# Altium PCB mc60_programmer.PcbDoc
Units mm, origin at the board's own origin, x right, y up, seen from the top; angles counter-clockwise.
Board outline 93.09 x 91.31 mm, 2 copper layers (Top Layer, Bottom Layer); 44 components, 39 nets, 246 pads, 56 vias.
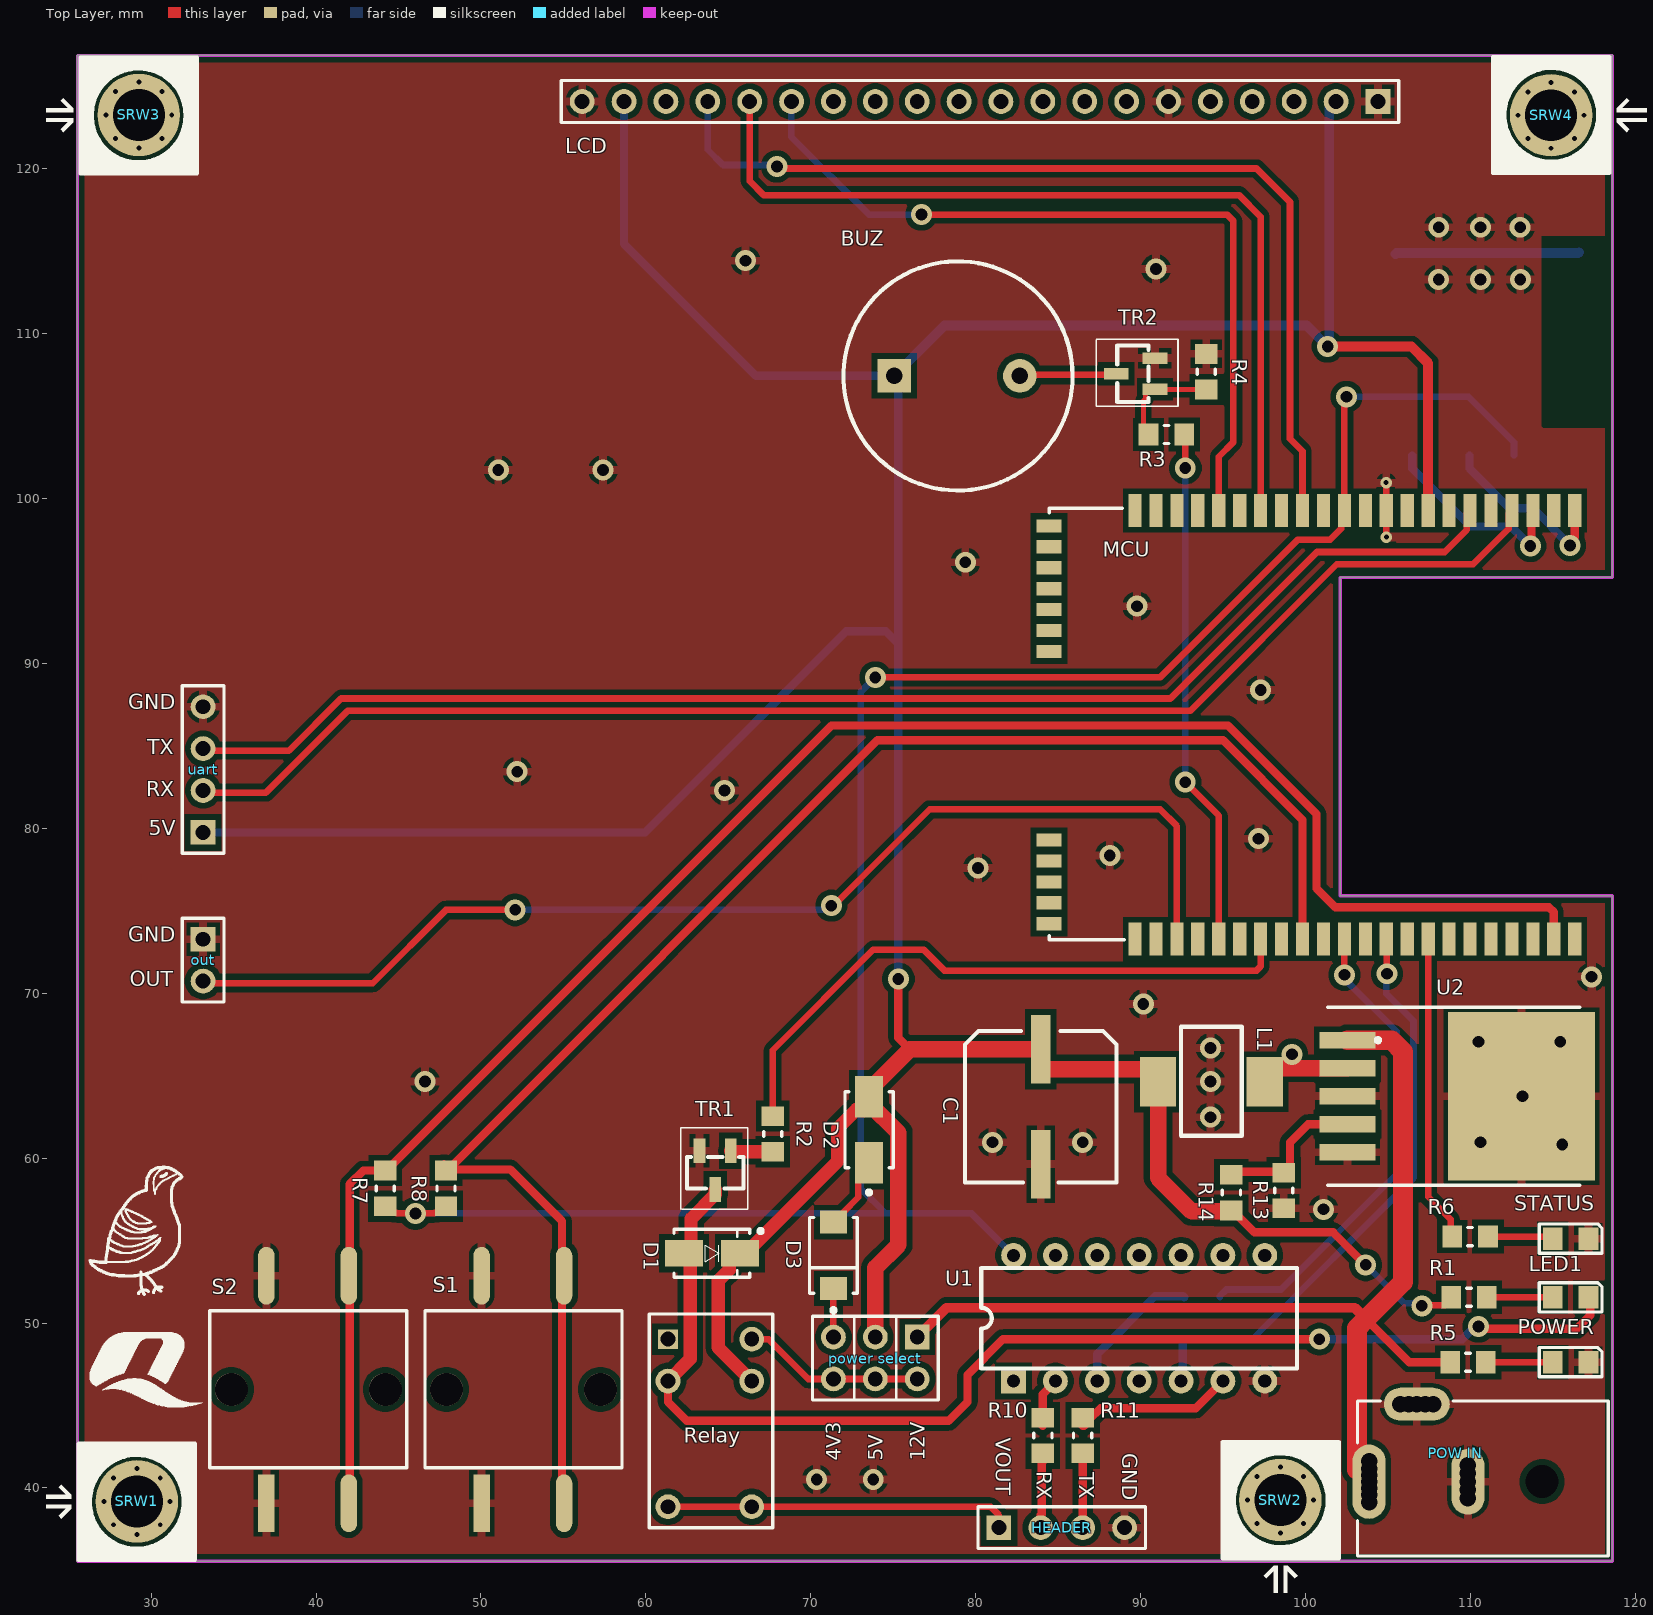
[diagram p0: Top Layer view]
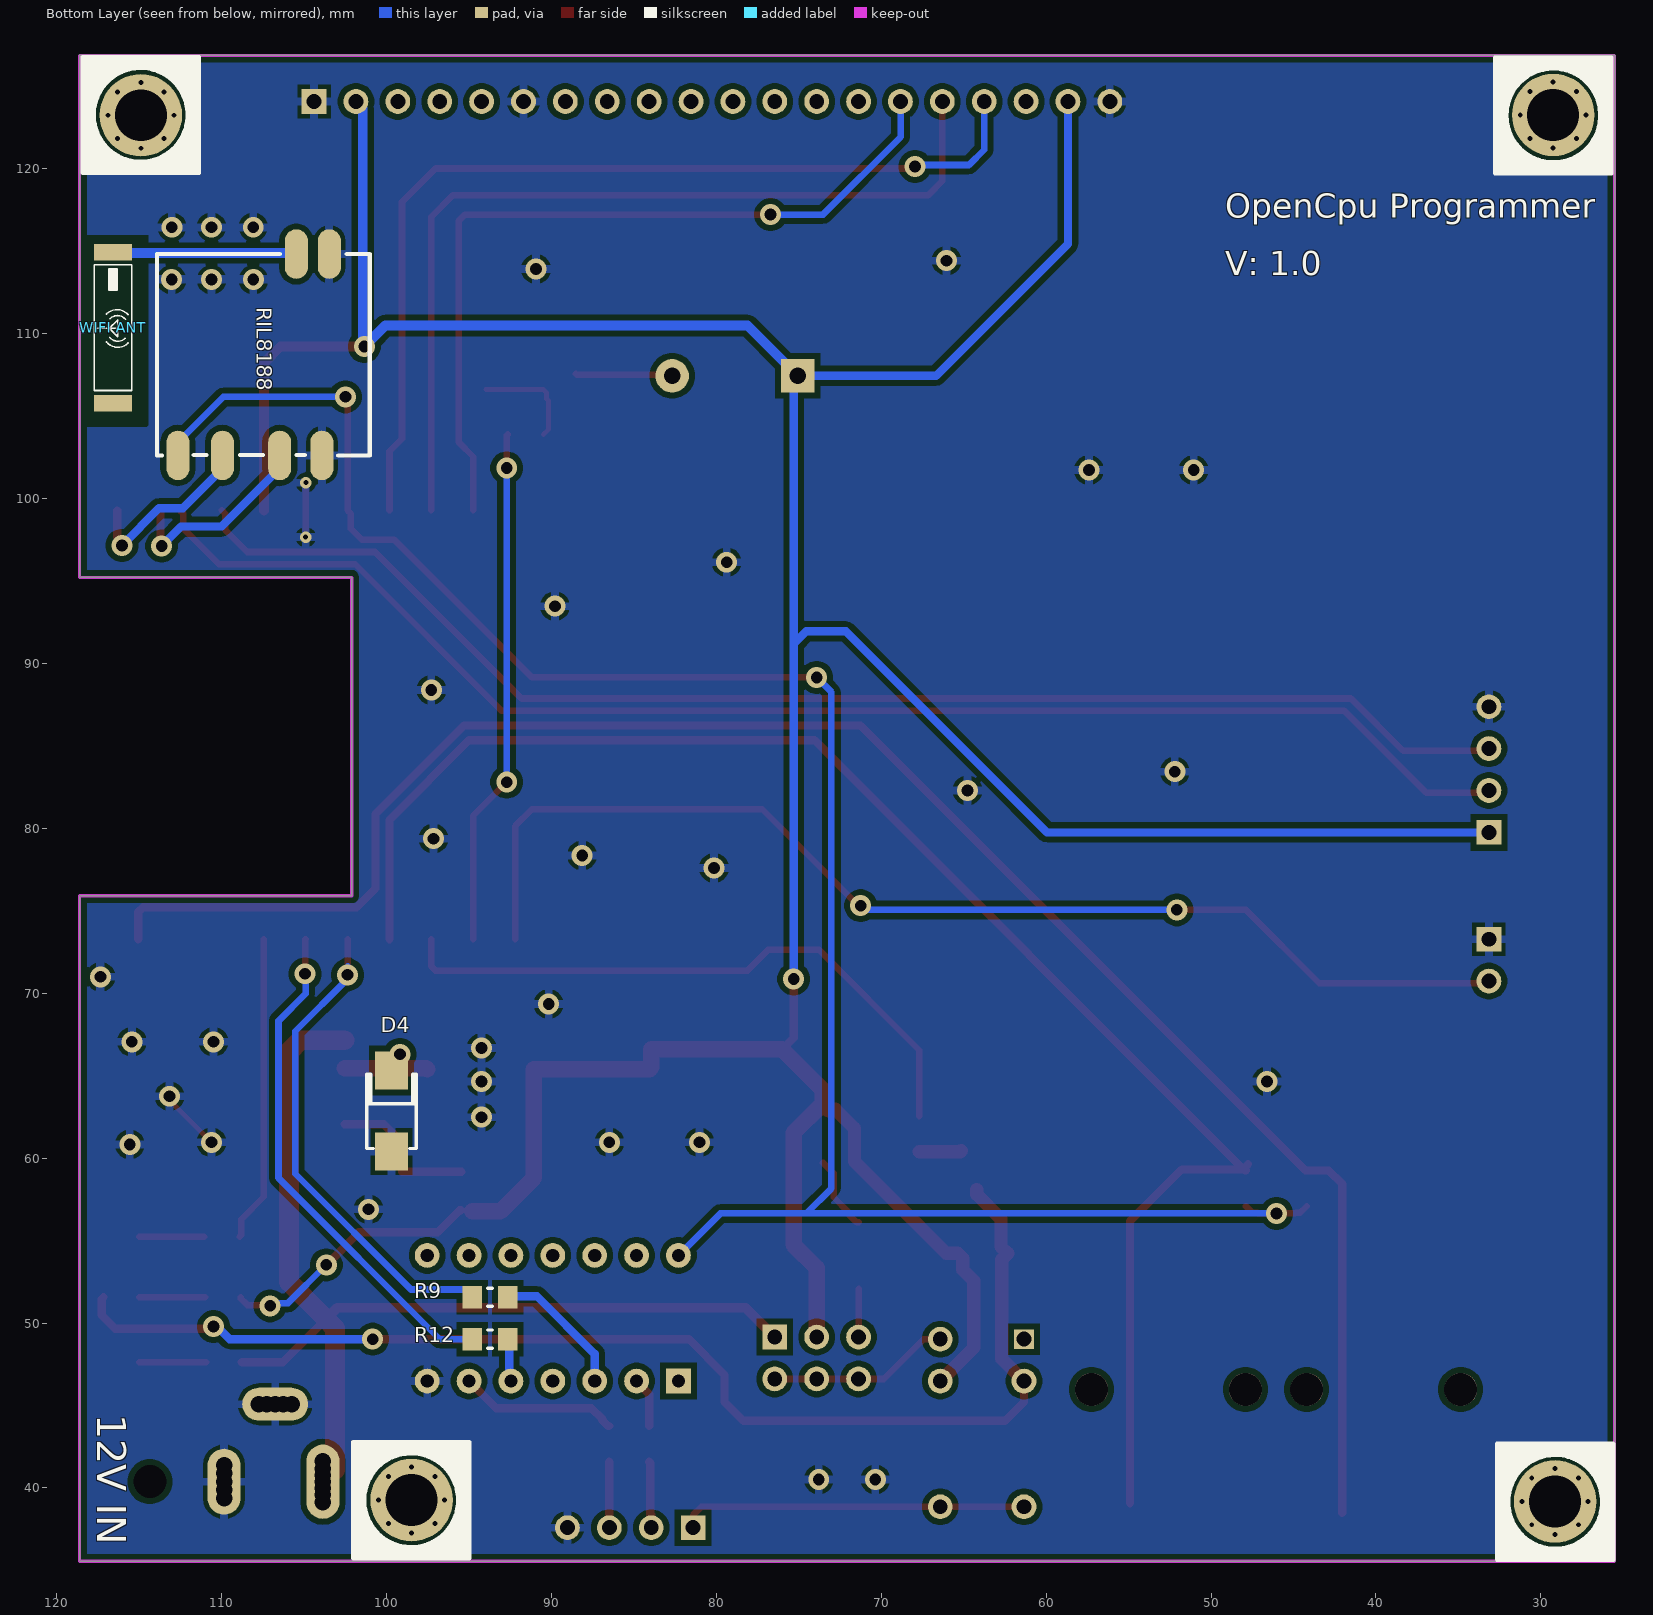
[diagram p1: Bottom Layer view, seen from below]
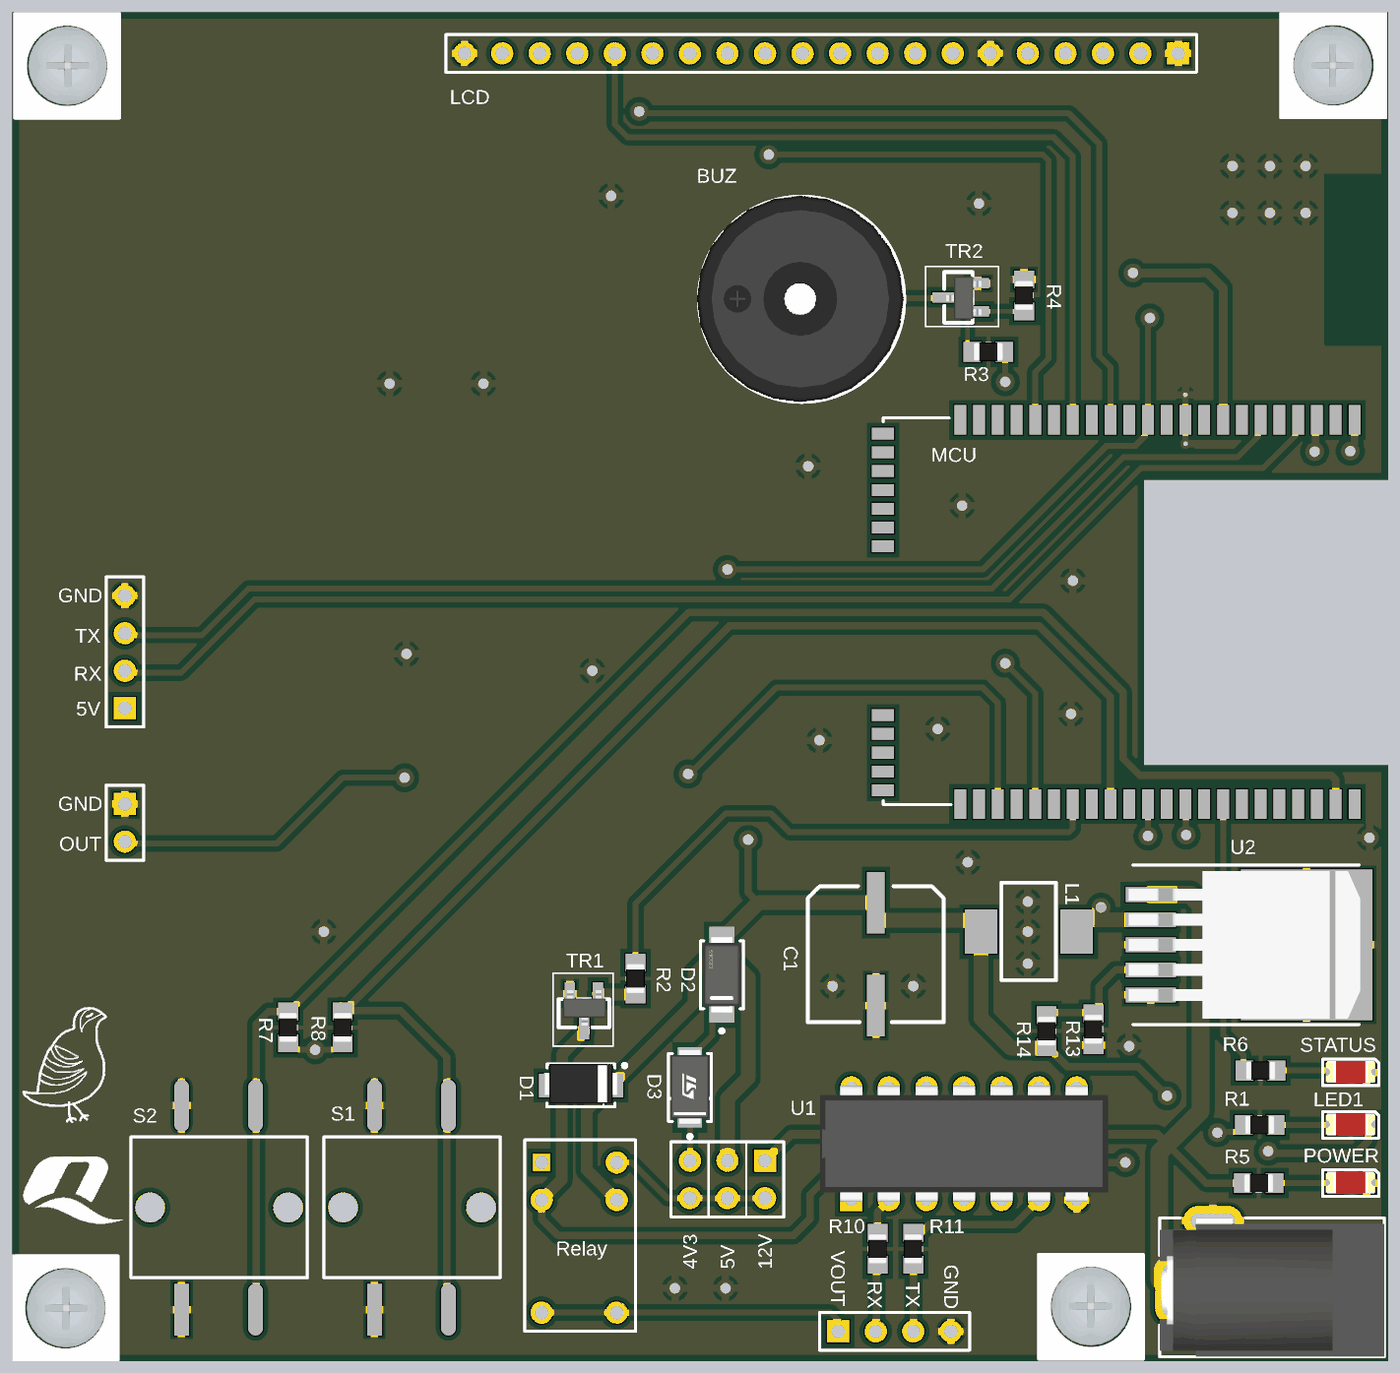
[diagram p2: 3D render of the assembled board from above, using the file's embedded part models]
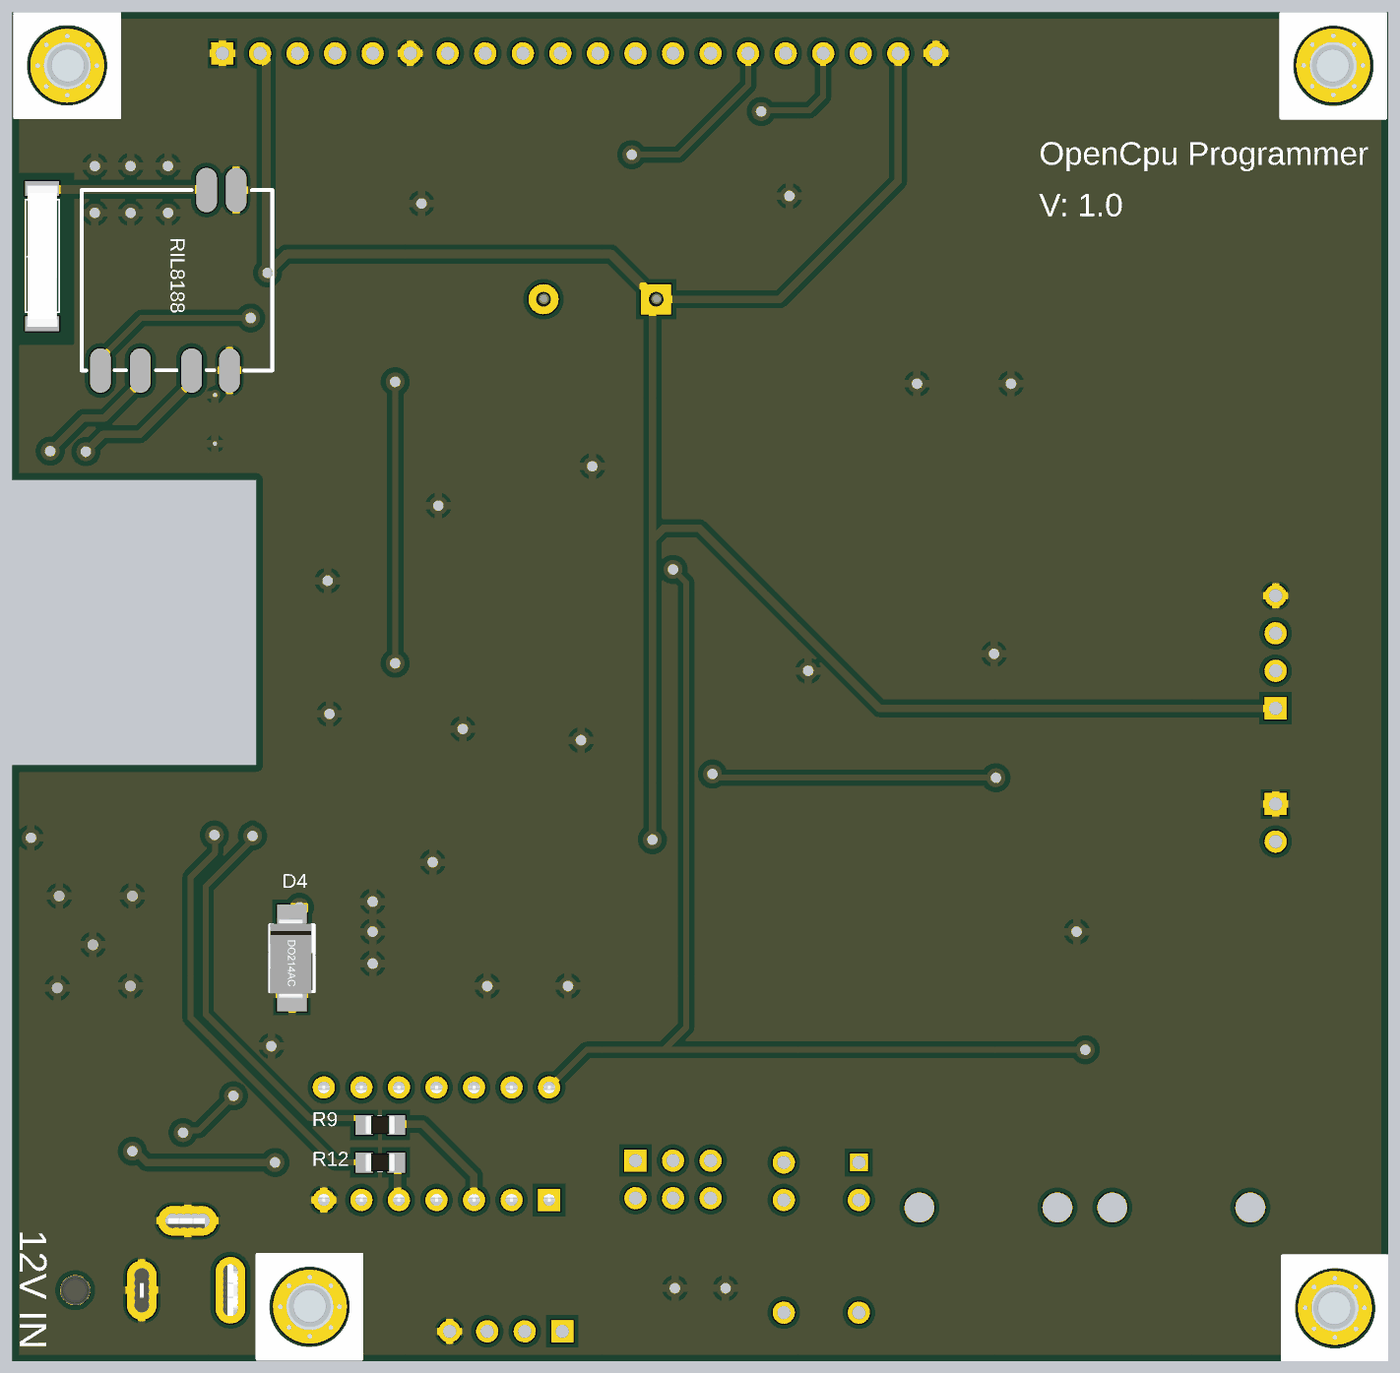
[diagram p3: 3D render of the assembled board from below, using the file's embedded part models]

## Layer stack, top to bottom
Top Solder: solder mask 0.0102, Solder Resist, Dk 3.5
Top Layer: signal copper 0.0356
Dielectric 1: dielectric 0.32, FR-4, Dk 4.8
Bottom Layer: signal copper 0.0356
Bottom Solder: solder mask 0.0102, Solder Resist, Dk 3.5

## Board outline
25.527,35.56 25.527,126.873 118.618,126.873 118.618,95.215 102.108,95.215 102.108,75.911 118.618,75.911 118.618,35.56

## Design rules (kind name [scope] priority, off if disabled: settings)
Clearance [All] p1: gap=0.35 ignorepadtopadclearanceinfootprint=FALSE
PolygonConnect [All] p1: connectstyle=Relief reliefconductorwidth=0.5 reliefentries=4 polygonreliefangle="90 Angle" airgapwidth=0.254
RoutingVias [All] p1: holewidth=0.711 width=1.27 viastyle="Through Hole" minholewidth=0.711 minwidth=1.27 maxholewidth=0.711 maxwidth=1.27
SolderMaskExpansion [All] p1: expansion=0.102 istentingtop=FALSE
Width [All] p1: maxlimit=5 minlimit=0.3 preferedwidth=0.3
30 further rules are at their usual default settings.

## Components (designator, comment, footprint, x,y, rotation, side; value= is the part's Value field where it differs from the comment)
BUZ "BUZZER" BUZZER 78.867,107.442 r0 top
C1 "1000uF 6V" "ALUMINUM \"CAP\"" 83.947,63.119 r180 top
D1 "1n4007" DIOM4629X24N 64.008,54.229 r0 top
D2 "1N4007" FP-SMA-MFG#1 73.533,61.722 r90 top
D3 "SS34" FP-SMA-MFG#2 71.374,54.102 r90 top
D4 "Diode" "DIODE DO-214AC SMD" 99.695,62.865 r0 bottom
HEADER "Header 4" HDR1X4 81.407,37.592 r0 top
L1 "100UH" INDOCTUR 97.79,67.945 r180 top
LCD "Header 20" HDR1X20 104.394,124.079 r180 top (schematic designator lcd)
LED1 "LED 2PIN" "LED 0805" 116.078,51.562 r0 top
MCU "licheepi_nano" licheepi_nano 116.332,99.279 r270 top
out "Header 2" HDR1X2 33.147,73.279 r270 top
"POW IN" "Power jack" "Power Jack" 109.105,42.103 r180 top
POWER "LED 2PIN" "LED 0805" 116.078,47.625 r0 top
"power select" "Header 3X2" HDR2X3 76.454,49.149 r180 top
R1 "4.7K" 0805_1/8W 109.919,51.562 r180 top
R2 "1k" 0805_1/8W 67.691,61.468 r90 top
R3 "4k7" 0805_1/8W 91.567,103.886 r0 top
R4 "47k" 0805_1/8W 93.98,107.696 r270 top
R5 "4.7K" 0805_1/8W 109.855,47.625 r0 top
R6 "4.7K" 0805_1/8W 109.982,55.245 r0 top
R7 "4.7K" 0805_1/8W 47.879,58.166 r90 top
R8 "4.7K" 0805_1/8W 44.196,58.166 r90 top
R9 "100R" 0805_1/8W 93.726,51.562 r180 bottom
R10 "100R" 0805_1/8W 84.074,43.18 r90 top
R11 "100R" 0805_1/8W 86.487,43.18 r90 top
R12 "100R" 0805_1/8W 93.726,49.022 r180 bottom
R13 "4.7K" 0805_1/8W 98.679,58.039 r270 top
R14 "10K" 0805_1/8W 95.504,57.912 r90 top
Relay "inanbo 5v 6pin" relay 61.341,49.022 r0 top
RIL8188 "Network Module" ril8188 106.862,108.848 r270 bottom
S1 "SWITCH" "push button" 52.324,45.847 r90 top
S2 "SWITCH" "push button" 39.273,45.847 r90 top
SRW1 "Screw" "Board Screw" 29.134,39.182 r270 top
SRW2 "Screw" "Board Screw" 98.48,39.266 r0 top
SRW3 "Screw" "Board Screw" 29.248,123.262 r270 top (schematic designator SRW1)
SRW4 "Screw" "Board Screw" 114.897,123.245 r90 top (schematic designator SRW1)
STATUS "LED 2PIN" "LED 0805" 116.078,55.118 r0 top
TR1 "NPN SMD" "Transistore npn" 66.172,56.896 r90 top
TR2 "NPN SMD" "Transistore npn" 87.313,105.598 r0 top
U1 "74HC125" "DIP14 7.62mm" 89.916,50.292 r90 top
U2 "LM2576 SMD" "TO-263 5 LEAD" 107.823,63.754 r270 top
uart "Header 4" HDR1X4 33.147,79.756 r90 top (schematic designator Uart)
"WIFI ANT" "Chip Antenna" "2.4GHz Antenna" 117.856,115.57 r270 bottom

## Footprints (in the part's own frame and the unit in brackets; to place one, negate y for a bottom-side part, rotate by r counter-clockwise, add the part's x,y. Pads: shape width x height; smd on the part's side, far side on the other; paste and mask are expansions set on the pad)
"2.4GHz Antenna" [mm]
  rect 1x2.3 smd: 1(0.635,1.27) 2(9.779,1.27)
  silkscreen extent 1.4,0.13 9.02,2.41, body extent 0.44,0.25 9.98,2.29, height 1.02
0805_1/8W [mm] "Chip Resistor, 2-Leads, Body 2.0x1.3mm, IPC High Density _ (0.100 W)"
  rect 1.2x1.35 smd: 1(-1.079,0) 2(1.079,0)
  silkscreen extent -0.15,-0.55 0.15,0.55, body extent -1.02,-0.63 1.02,0.64, height 0.6
"ALUMINUM \"CAP\"" [mm]
  rect 1.2x4.16 smd: 1(0,-3.48) 2(0,3.48)
  silkscreen extent -4.6,-4.6 4.6,4.6
"Board Screw" [mm]
  round 0.6 hole 0.3: S(-2,0) S(-1.414,1.414) S(-1.414,-1.414) S(0,2) S(0,-2) S(1.414,1.414) S(1.414,-1.414) S(2,0)
  round 5 hole 3.15 mask+0.1: SRW1(0,0)
  silkscreen extent -3.49,-6.75 3.56,3.52, body extent -2.67,-2.64 2.69,2.72, height 2.34
BUZZER [mil]
  rect 80x80 hole 39.37: 1(-150,0)
  round 80 hole 39.37: 2(150,0)
  silkscreen extent -271,-274 276,273, body extent -277,-275 275,277, height 329
"DIODE DO-214AC SMD" [mm]
  rect 2x2.3 smd: 1(0,2.462) 2(0,-2.462)
  silkscreen extent -1.5,-2.34 1.5,2.29, body extent -1.32,-2.69 1.47,2.79, height 2.24
DIOM4629X24N [mm] "Molded Diode, 2-Leads, Body 4/60x2/90mm, IPC Medium Density-Design:Abbas Basereh"
  rect 2.3x1.6 smd: 1(-1.7,0) 2(1.7,0)
  silkscreen extent -2.3,-1.45 3.08,1.47, body extent -2.5,-1.22 2.5,1.48, height 2.2
"DIP14 7.62mm" [mm]
  rect 1.5x1.5 hole 0.8: 1(-3.81,7.62)
  round 1.5 hole 0.8: 2(-3.81,5.08) 3(-3.81,2.54) 4(-3.81,0) 5(-3.81,-2.54) 6(-3.81,-5.08) 7(-3.81,-7.62) 8(3.81,-7.62) 9(3.81,-5.08) 10(3.81,-2.54) 11(3.81,0) 12(3.81,2.54) 13(3.81,5.08) 14(3.81,7.62)
  silkscreen extent -3.05,-9.58 3.05,9.58, body extent -3.94,-9.75 3.93,9.75, height 5.08
FP-SMA-MFG#1 [mm]
  rect 2.5x1.7 smd paste+0 mask+0: 1(-2,0) 2(2,0)
  silkscreen extent -3.92,-1.46 2.3,1.46, body extent -2.6,-1.3 2.6,1.3, height 2.4
FP-SMA-MFG#2 [mm]
  rect 1.4x1.64 smd paste+0 mask+0: 1(-2.015,0) 2(2.015,0)
  silkscreen extent -3.45,-1.45 2.3,1.45, body extent -2.5,-1.28 2.58,1.3, height 2.65
HDR1X2 [mm] "Connector; Header; 2 Position"
  rect 1.5x1.5 hole 0.9: 1(0,0)
  round 1.5 hole 0.9: 2(2.54,0)
  silkscreen extent -1.27,-1.27 3.81,1.27
HDR1X4 [mm] "Connector; Header; 4 Position"
  rect 1.5x1.5 hole 0.9: 1(0,0)
  round 1.5 hole 0.9: 2(2.54,0) 3(5.08,0) 4(7.62,0)
  silkscreen extent -1.27,-1.27 8.89,1.27
HDR1X20 [mm] "Connector; Header; 20 Position"
  rect 1.5x1.5 hole 0.9: 1(0,0)
  round 1.5 hole 0.9: 2(2.54,0) 3(5.08,0) 4(7.62,0) 5(10.16,0) 6(12.7,0) 7(15.24,0) 8(17.78,0) 9(20.32,0) 10(22.86,0) 11(25.4,0) 12(27.94,0) 13(30.48,0) 14(33.02,0) 15(35.56,0) 16(38.1,0) 17(40.64,0) 18(43.18,0) 19(45.72,0) 20(48.26,0)
  silkscreen extent -1.27,-1.27 49.53,1.27
HDR2X3 [mm] "Connector; Header; 3x2 Position"
  rect 1.5x1.5 hole 0.9: 1(0,0)
  round 1.5 hole 0.9: 2(0,2.54) 3(2.54,0) 4(2.54,2.54) 5(5.08,0) 6(5.08,2.54)
  silkscreen extent -1.27,-1.27 6.35,3.81
INDOCTUR [mm]
  rect 2.2x3 smd: 1(0.254,3.302) 2(6.731,3.302)
  silkscreen extent 1.65,-0.02 5.33,6.58
"LED 0805" [mm]
  rect 1.2x1.35 smd: 1(-1.079,0) 2(1.079,0)
  silkscreen extent -1.91,-0.89 1.91,0.89, body extent -1.65,-0.69 1.65,0.76, height 1.36
licheepi_nano [mm]
  rect 2x0.8 smd: 1(0,0) 2(0,-1.27) 3(0,-2.54) 4(0,-3.81) 5(0,-5.08) 6(0,-6.35) 7(0,-7.62) 8(0,-8.89) 9(0,-10.16) 10(0,-11.43) 11(0,-12.7) 12(0,-13.97) 13(0,-15.24) 14(0,-16.51) 15(0,-17.78) 16(0,-19.05) 17(0,-20.32) 18(0,-21.59) 19(0,-22.86) 20(0,-24.13) 21(0,-25.4) 22(0,-26.67) 43(26,-26.67) 44(26,-25.4) 45(26,-24.13) 46(26,-22.86) 47(26,-21.59) 48(26,-20.32) 49(26,-19.05) 50(26,-17.78) 51(26,-16.51) 52(26,-15.24) 53(26,-13.97) 54(26,-12.7) 55(26,-11.43) 56(26,-10.16) 57(26,-8.89) 58(26,-7.62) 59(26,-6.35) 60(26,-5.08) 61(26,-3.81) 62(26,-2.54) 63(26,-1.27) 64(26,0)
  rect 0.8x1.5 smd: 23(0.935,-31.89) 24(2.205,-31.89) 25(3.475,-31.89) 26(4.745,-31.89) 27(6.015,-31.89) 28(7.285,-31.89) 29(8.555,-31.89) 38(19.985,-31.89) 39(21.255,-31.89) 40(22.525,-31.89) 41(23.795,-31.89) 42(25.065,-31.89)
  Keep-Out Layer lines w0.2: 23.368,2.286 23.368,-14.224 4.064,-14.224 4.064,2.286
  silkscreen extent -0.13,-31.88 26.04,-27.3
"Power Jack" [mm] "Power Adaptor Jack"
  round 1.5 hole 1: 1(5.25,2.975) 1(5.25,0.475) 1(5.25,0.925) 1(5.25,1.325) 1(5.25,2.125) 1(5.25,2.525) 2(-0.75,2.725) 2(-0.75,0.725) 2(-0.75,2.225) 2(-0.75,1.225) 3(1.35,-2.975) 3(1.85,-2.975) 3(2.85,-2.975) 3(3.35,-2.975)
  oval 2x4.5 hole 1: 1(5.25,1.725)
  oval 2x4 hole 1: 2(-0.75,1.725)
  oval 4x2 hole 1: 3(2.35,-2.975)
  round 1.9 hole 2: MH(-5.25,1.725)
  silkscreen extent -9.25,-3.18 5.95,6.23, body extent -9.25,-3.17 5.95,6.23, height 11
"push button" [mm]
  rect 3.5x1 smd: 1(-6.778,2.286)
  oval 3.5x1 smd: 1(7.022,2.286) 2(-6.778,-2.714) 2(7.022,-2.714)
  round 2 hole 2: 6(0.127,4.415) 8(0.127,-4.923)
  silkscreen extent -4.62,-6.22 4.9,5.71
relay [mm]
  rect 1.2x1.2 hole 0.9: 1(0,0)
  round 1.5 hole 0.9: 2(5.08,0) 3(0,-2.54) 4(5.08,-2.54) 5(0,-10.16) 5(5.08,-10.16)
  silkscreen extent -1.14,-11.43 6.35,1.52
ril8188 [mm]
  oval 3x1.4 smd: 1(-5.978,3.392) 2(-5.978,1.392) 3(6.232,-5.787) 4(6.232,-3.087) 5(6.232,0.383) 6(6.232,2.942)
  silkscreen extent -5.98,-7.06 6.23,5.84
"TO-263 5 LEAD" [mm]
  rect 1x3.4 smd: 1(-3.4,-5.275) 2(-1.7,-5.275) 3(0,-5.275) 4(1.7,-5.275) 5(3.4,-5.275)
  rect 10.2x8.9 smd: 6(0,5.275)
  silkscreen extent -5.4,-6.48 5.4,8.82, body extent -5,-6.77 5,8.9, height 4.78
"Transistore npn" [mm]
  rect 1.5x0.7 smd: 1(3.556,1.021) 2(3.556,2.921) 3(1.206,1.971)
  silkscreen extent 0,0 4.95,4.06, body extent 1.39,0.48 3.79,3.38, height 1

## Part data
C1: library part CAP
D1: library part "1n4007 SMD M7", "Standard Rectifiers", Manufacturer="DC COMPONENTS", Data=16-12-2016, Designer="Abbas Basereh", Link=http://www.tme.eu/en/details/m7/smd-universal-diodes/dc-components/, Part. No=M7
D2: library part CMP-12828-000004-1, "TVS DIODE 15V 24.4V SMA", Breakdown Voltage=16.7V, Clamping Voltage=24.4V, Manufacturer="Diodes Inc", Manufacturer Part Number=SMAJ15A-13-F, Max Junction Temp=+150°C, Package=SMA, Peak Pulse Current=16.4A, Peak Pulse Power=400W, Reverse Standoff Voltage=15V, Temperature="-55°C to +150°C", Temperature Range Low=-55°C, Automotive=No, Category=Diode, ComponentLink2Description=Datasheet, ComponentLink2URL=https://www.diodes.com/assets/Datasheets/ds19005.pdf, Device Class L1="Circuit Protection", Device Class L2="TVS Diodes", Device Class L3=unset, Digikey Description="TVS DIODE 15V 24.4V SMA", Direction=Unidirectional, Footprint Url=https://www.diodes.com/assets/Package-Files/SMA.pdf, Height=2.4mm, Lead Free=Yes, Mouser Description="TVS DIODE 15V 24.4V SMA", Number Of Channels=1, Octopart=https://octopart.com/smaj15a-13-f-diodes+inc.-349875, RoHS=TRUE, Standoff Height=0.05mm, Temperature Range High=+150°C
D3: library part CMP-12187-000020-1, "DIODE SCHOTTKY 40V 1A SMA", Forward Current=1A, Manufacturer=STMicroelectronics, Manufacturer Part Number=STPS140A, Max Junction Temp=+150°C, Max Repetitive Reverse Voltage=40V, Max Surge Forward Current=60A, Package=SMA, Peak Reverse Current=12uA, Temperature="to +150°C", Automotive=No, Category=Diode, ComponentLink2Description=Datasheet, ComponentLink2URL=https://www.st.com/content/ccc/resource/technical/document/datasheet/64/e3/d7/a9/4a/d4/48/35/CD00001107.pdf/files/CD00001107.pdf/jcr:content/translations/en.CD00001107.pdf, Device Class L1="Discrete Semiconductors", Device Class L2=Diodes, Device Class L3="Schottky Diodes", Digikey Description="DIODE SCHOTTKY 40V 1A SMA", Height=2.65mm, Lead Free=Yes, Mouser Description="Schottky Diodes & Rectifiers 1.0 Amp 40 Volt", Octopart=https://octopart.com/stps140a-stmicroelectronics-324279, RoHS=TRUE, Standoff Height=0.05mm, Temperature Range High=+150°C
HEADER uart: "Header, 4-Pin", LatestRevisionDate=17-Jul-2002, LatestRevisionNote="Re-released for DXP Platform.", Publisher="Altium Limited"
L1: library part Inductor, "Inductor"
LCD: "Header, 20-Pin", LatestRevisionDate=17-Jul-2002, LatestRevisionNote="Re-released for DXP Platform.", Publisher="Altium Limited"
out: "Header, 2-Pin", LatestRevisionDate=17-Jul-2002, LatestRevisionNote="Re-released for DXP Platform.", Publisher="Altium Limited"
"power select": "Header, 3-Pin, Dual row", LatestRevisionDate=17-Jul-2002, LatestRevisionNote="Re-released for DXP Platform.", Publisher="Altium Limited"
R1 R2 R3 R4 R5 R6 R7 R8 R9 R10 R11 R12 R13 R14: library part RESISTOR
Relay: library part relay
RIL8188: library part RIL8188
SRW1 SRW2 SRW3 SRW4: library part "Board Screw 3MM", "Board Screw With Spacer"

## Via types
v1: diameter 1.27, hole 0.711, Top Layer to Bottom Layer, tented both sides, 54 vias
v2: diameter 0.7, hole 0.3, Top Layer to Bottom Layer, tented both sides, 2 vias

## Nets (pads, with @x,y where several pads share a name; then routed paths per layer and width w, separated by ;. In a path a pad name is that pad's centre, name@x,y a point inside that pad or via, vN(x,y) a via of type N, cw(c..) or ccw(c..) an arc to the next point about the centre after c; other vN are vias at no path point)
3V3: MCU.12 R7.1 R8.1 RIL8188.3 U1.14 | length 127.1
  Top Layer w0.4: R8.1 44.596,56.687 44.865,56.687 44.905,56.647 v1(46.022,56.647) 47.17,56.647 47.21,56.687 47.479,56.687 R7.1 ; v1(73.914,89.154) 91.186,89.154 99.544,97.512 101.503,97.512 102.162,98.171 102.162,99.079 MCU.12 102.362,106.045 v1(102.489,106.172)
  Bottom Layer w0.4: v1(46.022,56.647) 74.544,56.647 ; v1(73.914,89.154) 73.023,88.263 73.023,58.168 74.544,56.647 ; U1.14 79.751,56.647 74.544,56.647 ; v1(102.489,106.172) 109.893,106.172 112.649,103.416 RIL8188.3
4V3: "power select.5" D3.1 | length 2.9
  Top Layer w0.4: 71.374,49.149 D3.1
5V: "power select.3" BUZ.1 C1.1 D1.2 D2.2 L1.2 LCD.2 LCD.19 MCU.8 R1.2 R14.1 Relay.4 uart.1 | length 260.2
  Top Layer w0.4: v1(107.06,51.042) 107.105,51.087 108.44,51.087 108.84,51.487 R1.2
  Top Layer w0.5: v1(75.311,70.866) 75.311,67.298 76.01,66.599 ; R14.1 95.579,56.833 96.913,55.499 101.684,55.499 v1(103.651,53.532)
  Top Layer w0.6: v1(101.346,109.22) 105.918,109.22 105.923,109.225 106.421,109.225 107.442,108.204 MCU.8
  Top Layer w0.8: Relay.4 64.389,48.514 64.389,52.56 65.058,53.229 65.058,53.929 65.358,54.229 D1.2 66.058,54.229 71.628,59.799 71.628,61.817 D2.2@72.783,62.972
  Top Layer w1: D2.2@73.183,62.972 D2.2@73.533,63.322 ; 73.914,49.149 73.914,53.34 75.311,54.737 75.311,61.544 D2.2@73.533,63.322 ; 94.805,56.769 93.091,56.769 91.059,58.801 91.059,65.405 84.047,65.405 83.947,65.505 C1.1 76.01,66.599 73.533,64.122 D2.2 D2.2@73.533,63.322
  Bottom Layer w0.4: v1@103.632,53.594 103.632,53.551 v1(103.651,53.532) 105.975,51.209 106.893,51.209 v1(107.06,51.042)
  Bottom Layer w0.5: uart.1 59.944,79.756 72.136,91.948 74.549,91.948 75.311,91.186 ; LCD.19 58.674,115.443 66.675,107.442 BUZ.1 75.311,107.188 75.311,91.186 ; v1(75.311,70.866) 75.311,91.186
  Bottom Layer w0.6: BUZ.1 78.105,110.49 100.076,110.49 v1(101.346,109.22) 101.443,109.317 101.443,123.655 LCD.2@101.54,123.752
12V: "POW IN.1" "power select.1" R5.1 U2.1 | length 66.1
  Top Layer w0.5: 103.677,50.241 105.594,48.323 106.293,47.625 R5.1
  Top Layer w0.6: 76.454,49.149 78.232,50.927 102.991,50.927 103.677,50.241
  Top Layer w1.2: U2.1 105.215,67.154 105.918,66.451 105.918,52.482 103.677,50.241 103.124,49.688 103.124,41.109 103.455,40.778 103.855,40.378 ; 103.855,40.778 103.886,40.809 ; 103.855,41.178 103.855,41.628
BTN_1: MCU.63 R8.2 S2.2 | length 113.5
  Top Layer w0.5: S2.2@42.037,38.484 42.037,58.42 42.862,59.245 R8.2 44.271,59.245 71.259,86.233 95.309,86.233 100.672,80.87 100.672,76.357 101.818,75.211 114.769,75.211 115.062,74.918 MCU.63
BTN_2: MCU.51 R7.2 S1.2 | length 97.6
  Top Layer w0.5: R7.2@47.752,59.627 48.007,59.372 R7.2@48.044,59.335 ; R7.2 R7.2@47.954,59.245 ; S1.2@54.911,39.069 54.911,52.869 54.911,56.175 51.777,59.309 48.018,59.309 74.053,85.344 94.996,85.344 99.822,80.518 MCU.51
BUZZER: MCU.47 R3.2 | length 31.5
  Top Layer w0.4: R3.2 92.71,103.822 v1(92.71,101.854) ; v1(92.71,82.804) 94.742,80.772 MCU.47
  Bottom Layer w0.4: v1(92.71,82.804) v1(92.71,101.854)
GND: "POW IN.2" "POW IN.3" C1.2 D4.1 HEADER.4 LCD.1 LCD.6 LCD.20 MCU.10 out.1 POWER.2 R4.1 R13.2 RIL8188.1 RIL8188.6 S1.1 S2.1 STATUS.2 TR1.2 TR2.2 U1.7 U2.3 U2.5 U2.6 uart.4 | length 7.1
  Top Layer w0.3: v1(110.617,60.96) 113.098,63.441 U2.6
  Top Layer w0.4: v2(104.894,100.965) 104.898,100.961 104.898,97.667 v2(104.902,97.663)
  other v1: 70.358,40.513 73.787,40.513 101.092,56.896 115.57,60.833 81.026,60.96 86.487,60.96 94.234,62.484 113.157,63.754 46.609,64.643 94.234,64.643 94.234,66.675 110.49,67.056 115.443,67.056 90.17,69.342 117.348,70.993 80.137,77.597 88.138,78.359 97.155,79.375 64.77,82.296 52.197,83.439 97.282,88.392 89.789,93.472 79.375,96.139 51.054,101.727 57.404,101.727 108.077,113.284 110.61,113.284 113.03,113.284 90.932,113.919 66.04,114.427 108.084,116.452 110.617,116.452 113.023,116.452
NetBUZ_2: BUZ.2 TR2.3 | length 5.9
  Top Layer w0.4: BUZ.2 82.74,107.505 88.456,107.505 TR2.3
NetD1_1: D1.1 LED1.2 Relay.3 TR1.3 | length 75.7
  Top Layer w0.5: Relay.3 61.341,45.212 62.484,44.069 78.359,44.069 79.502,45.212 79.502,46.863 81.661,49.022 v1(100.838,49.022) ; v1(110.49,49.784) 110.617,49.657 116.459,49.657 117.268,50.466 117.268,51.451 LED1.2
  Top Layer w0.8: Relay.3 62.691,47.832 62.691,53.846 D1.1 62.338,54.229 62.738,54.629 62.738,56.339 64.201,57.802 TR1.3
  Bottom Layer w0.5: v1(100.838,49.022) 109.52,49.022 110.282,49.784 v1(110.49,49.784)
NetD2_1: D2.1 D3.2 | length 4.6
  Top Layer w0.4: D3.2 71.494,56.117 71.994,56.617 71.994,56.737 72.883,57.626 72.883,59.072 D2.1
NetD4_2: D4.2 L1.1 U2.2 | length 6.2
  Top Layer w1: L1.1@97.536,65.405 97.585,65.454 U2.2
  Bottom Layer w0.3: v1(99.187,66.294) 99.187,65.835 D4.2
NetLED1_1: LED1.1 R1.1 | length 4
  Top Layer w0.4: R1.1 LED1.1
NetPOWER_1: POWER.1 R5.2 | length 4.1
  Top Layer w0.4: R5.2 POWER.1
NetR2_1: R2.1 TR1.1 | length 2.6
  Top Layer w0.8: TR1.1 65.151,60.439 65.201,60.389 R2.1
NetR3_1: R3.1 R4.2 TR2.1 | length 6.5
  Top Layer w0.3: R3.1 90.17,104.204 90.17,105.92 90.301,106.051 90.301,106.419 90.501,106.619 93.978,106.619 R4.2
NetR6_2: R6.2 STATUS.1 | length 3.9
  Top Layer w0.4: R6.2 STATUS.1@114.999,55.245
NetR9_2: R9.2 U1.3 | length 8.4
  Bottom Layer w0.5: U1.3 87.376,48.133 90.868,51.625 92.584,51.625 R9.2
NetR10_2: R10.2 U1.2 | length 3
  Top Layer w0.5: R10.2@84.074,43.751 84.074,45.689 84.836,46.451 U1.2
NetR11_2: R11.2 U1.6 | length 9.7
  Top Layer w0.5: R11.2@86.487,43.751 86.562,43.751 86.912,44.101 86.912,44.176 87.567,44.831 93.345,44.831 U1.6
NetR12_2: R12.2 U1.5 | length 2.6
  Bottom Layer w0.5: U1.5 92.551,46.577 92.551,48.926 R12.2
NetR13_1: R13.1 R14.2 U2.4 | length 9.3
  Top Layer w0.5: R14.2@95.457,59.182 99.06,59.182 99.06,60.96 100.154,62.054 U2.4
NetRIL8188_2: "WIFI ANT.1" RIL8188.2 | length 11.2
  Bottom Layer w0.6: RIL8188.2 105.524,114.88 116.531,114.88 116.586,114.935
OUT_1: MCU.45 out.2 | length 70.7
  Top Layer w0.4: out.2@33.147,70.612 43.434,70.612 47.879,75.057 v1(52.07,75.057) ; v1(71.247,75.311) 71.374,75.311 74.61,78.547 77.216,81.153 91.186,81.153 92.202,80.137 MCU.45
  Bottom Layer w0.4: v1(52.07,75.057) 70.758,75.057 71.012,75.311 v1(71.247,75.311)
RELAY: MCU.49 R2.2 | length 38.4
  Top Layer w0.4: R2.2 67.691,66.548 73.787,72.644 76.835,72.644 78.105,71.374 97.028,71.374 97.282,71.628 MCU.49
RX: MCU.53 R9.1 | length 29.9
  Top Layer w0.4: v1(102.362,71.12) MCU.53
  Bottom Layer w0.4: R9.1 94.805,51.637 95.205,52.037 98.519,52.037 105.537,59.055 105.537,67.691 102.362,70.866 v1(102.362,71.12) v1@102.362,71.628
RX_IO: HEADER.2 R10.1 | length 3.3
  Top Layer w0.5: 83.947,38.354 84.01,38.417 84.01,41.53 R10.1@84.074,41.593
SPI0_CLK: LCD.15 MCU.18 | length 49.1
  Top Layer w0.4: LCD.15@68.453,123.685 LCD.15@68.52,123.752 ; v1@76.581,117.094 v1(76.708,117.221) 95.25,117.221 95.631,116.84 95.631,103.421 94.742,102.532 MCU.18
  Bottom Layer w0.4: LCD.15@68.52,123.752 68.818,123.454 68.818,121.936 73.533,117.221 v1(76.708,117.221)
SPI0_CS: LCD.17 MCU.14 | length 58.6
  Top Layer w0.4: v1(67.945,120.142) 68.072,120.015 97.028,120.015 99.06,117.983 99.06,103.632 99.822,102.87 MCU.14
  Bottom Layer w0.4: LCD.17 63.754,121.158 64.684,120.228 67.859,120.228 v1(67.945,120.142)
SPI0_MOSI: LCD.16 MCU.16 | length 54.5
  Top Layer w0.4: LCD.16 66.294,119.253 67.141,118.406 95.97,118.406 97.282,117.094 MCU.16
STATUS: MCU.57 R6.1 | length 18.6
  Top Layer w0.4: MCU.57 107.442,57.658 108.814,56.286 108.814,55.334 R6.1
TX: MCU.55 R12.1 | length 30.5
  Top Layer w0.4: MCU.55 104.921,73.26 104.921,71.2 v1(104.941,71.181)
  Bottom Layer w0.4: R12.1 96.774,49.022 106.553,58.801 106.553,68.326 104.902,69.977 v1@104.902,70.739
TX_IO: HEADER.3 R11.1 | length 3.2
  Top Layer w0.5: 86.487,38.354 R11.1@86.487,41.593
U0_RX: MCU.6 uart.3 | length 83.5
  Top Layer w0.4: uart.3 33.274,84.709 38.354,84.709 41.517,87.872 91.809,87.872 100.699,96.762 108.446,96.762 109.782,98.098 109.782,99.079 MCU.6
U0_TX: MCU.4 uart.2 | length 87
  Top Layer w0.4: uart.2 33.274,82.169 36.957,82.169 41.91,87.122 93.009,87.122 101.899,96.012 110.163,96.012 112.322,98.171 112.322,99.079 MCU.4
USB_DM: MCU.1 RIL8188.4 | length 11.1
  Top Layer w0.5: v1(116.047,97.16) 116.047,97.369 116.332,97.653 MCU.1
  Bottom Layer w0.5: RIL8188.4 109.949,101.816 112.35,99.415 113.793,99.415 v1(116.047,97.16)
USB_DP: MCU.3 RIL8188.5 | length 12.1
  Top Layer w0.5: v1(113.635,97.128) 113.714,97.206 113.714,99.201 MCU.3
  Bottom Layer w0.5: RIL8188.5 106.479,101.816 109.997,98.298 112.465,98.298 v1(113.635,97.128)
VIN: "power select.2" "power select.4" "power select.6" Relay.2 | length 11
  Top Layer w0.4: Relay.2 67.437,49.022 69.85,46.609 73.914,46.609 76.454,46.609
VOUT_M: HEADER.1 Relay.5 | length 20.3
  Top Layer w0.4: Relay.5@61.341,38.862 80.899,38.862 81.407,38.354
pads on no net: "POW IN.MH" "WIFI ANT.2" LCD.3 LCD.4 LCD.5 LCD.7 LCD.8 LCD.9 LCD.10 LCD.11 LCD.12 LCD.13 LCD.14 LCD.18 MCU.2 MCU.5 MCU.7 MCU.9 MCU.11 MCU.13 MCU.15 MCU.17 MCU.19 MCU.20 MCU.21 MCU.22 MCU.23 MCU.24 MCU.25 MCU.26 MCU.27 MCU.28 MCU.29 MCU.38 MCU.39 MCU.40 MCU.41 MCU.42 MCU.43 MCU.44 MCU.46 MCU.48 MCU.50 MCU.52 MCU.54 MCU.56 MCU.58 MCU.59 MCU.60 MCU.61 MCU.62 MCU.64 Relay.1 S1.6 S1.8 S2.6 S2.8 SRW1.S SRW1.SRW1 SRW2.S SRW2.SRW1 SRW3.S SRW3.SRW1 SRW4.S SRW4.SRW1 U1.1 U1.4 U1.8 U1.9 U1.10 U1.11 U1.12 U1.13

## Polygon pours and split planes (outlines as drawn)
GND on Bottom Layer "GND_L02_P001" (solid, pour order 1): 25.527,126.873 118.618,126.873 118.618,35.56 25.527,35.56
GND on Top Layer "GND_L01_P002" (solid, pour order 2): 25.527,126.873 118.618,126.873 118.618,35.56 25.527,35.56

## Keep-outs
Keep-Out Layer:
  lines w0.2: 118.618,75.911 118.618,35.56 25.527,35.56 25.527,126.873 118.618,126.873 118.618,95.215

## Other copper
Top Layer:
  pour cut-out: 102.108,95.25 118.745,95.25 118.745,76.073 118.618,75.946 102.108,75.946
  pour cut-out: 114.427,104.267 114.3,104.394 114.3,115.951 118.618,115.951 118.618,104.267
Bottom Layer:
  pour cut-out: 102.108,95.25 118.745,95.25 118.745,76.073 118.618,75.946 102.108,75.946
  pour cut-out: 114.554,104.329 114.427,104.456 114.427,116.013 118.745,116.013 118.745,104.329

## Silkscreen, mask and mechanical layers (free items; w line width, h text height)
Top Overlay:
  drawing of 1245 lines, arcs and shapes, not listed
  text "GND" at 28.621,86.931 h1.54
  text "TX" at 29.772,84.201 h1.54
  text "RX" at 29.695,81.633 h1.54
  text "5V" at 29.845,79.265 h1.54
  text "GND" at 28.621,72.834 h1.54
  text "OUT" at 28.702,70.121 h1.54
  text "VOUT" at 80.916,43.052 h1.54 r270
  text "GND" at 88.582,42.118 h1.54 r270
  text "4V3" at 72.136,41.656 h1.52 r90
  text "5V" at 74.676,41.656 h1.52 r90
  text "12V" at 77.216,41.656 h1.52 r90
  text "RX" at 83.411,41.02 h1.54 r270
  text "TX" at 85.979,40.943 h1.54 r270
Bottom Overlay:
  text "OpenCpu Programmer" at 49.149,116.548 h2.5
  text "V: 1.0" at 49.147,113.058 h2.5
  text "12V IN" at 118.118,44.458 h3 r90